# Altium PCB HighPowerMotorController.PcbDoc
Units mil, origin at the board's own origin, x right, y up, seen from the top; angles counter-clockwise.
Board outline 6000 x 6000 mil, 4 copper layers (Top Layer, Internal Plane 1, Internal Plane 2, Bottom Layer); 57 components, 49 nets, 172 pads, 28 vias.
Unrouted connection lines stored in the file: 1.
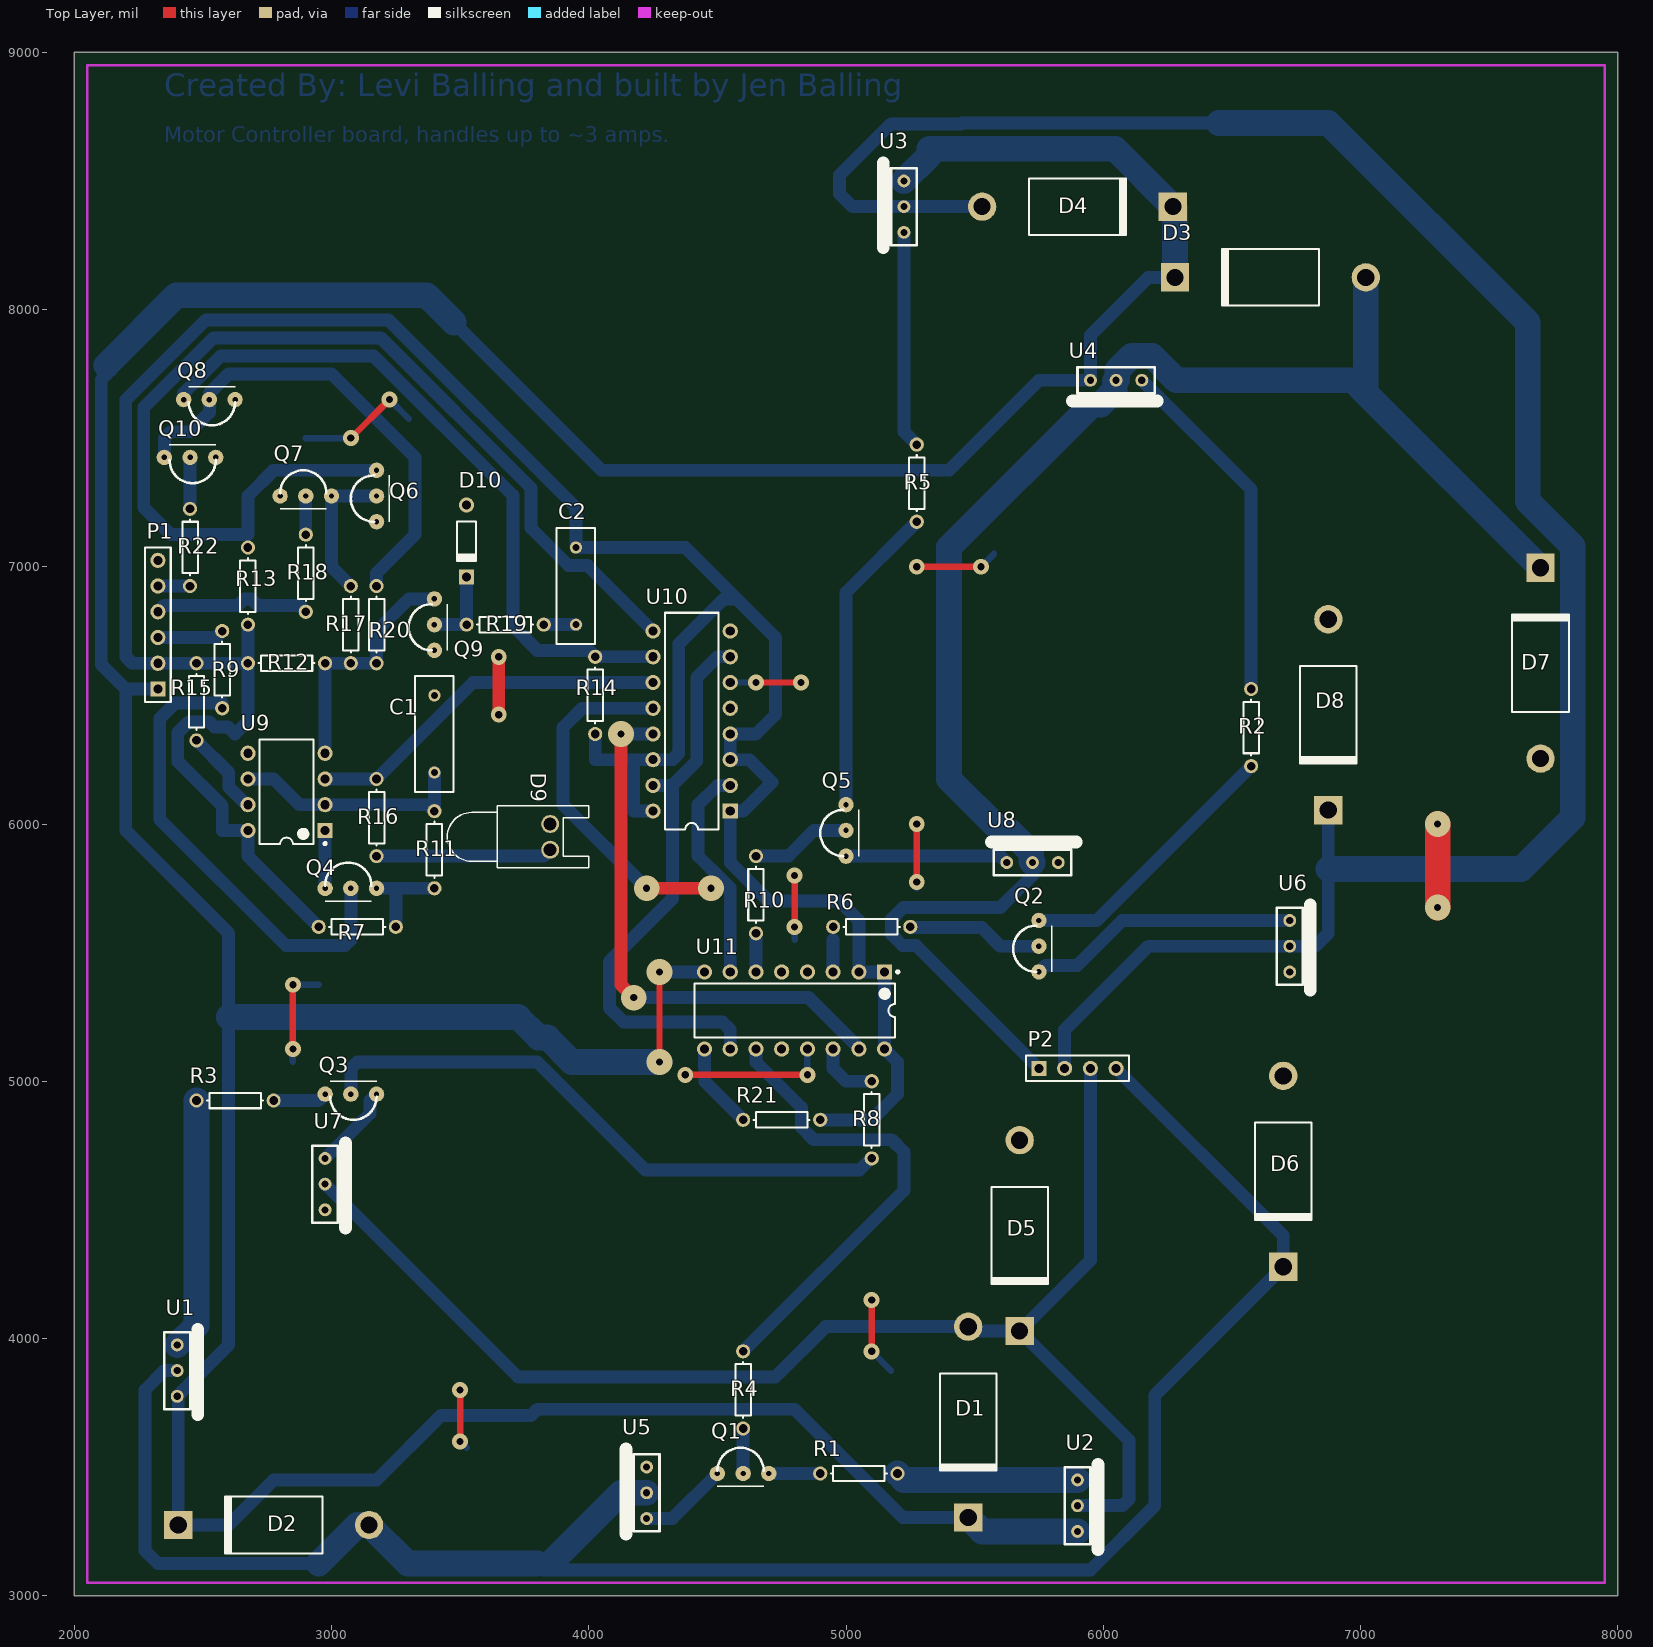
[diagram p0: Top Layer view]
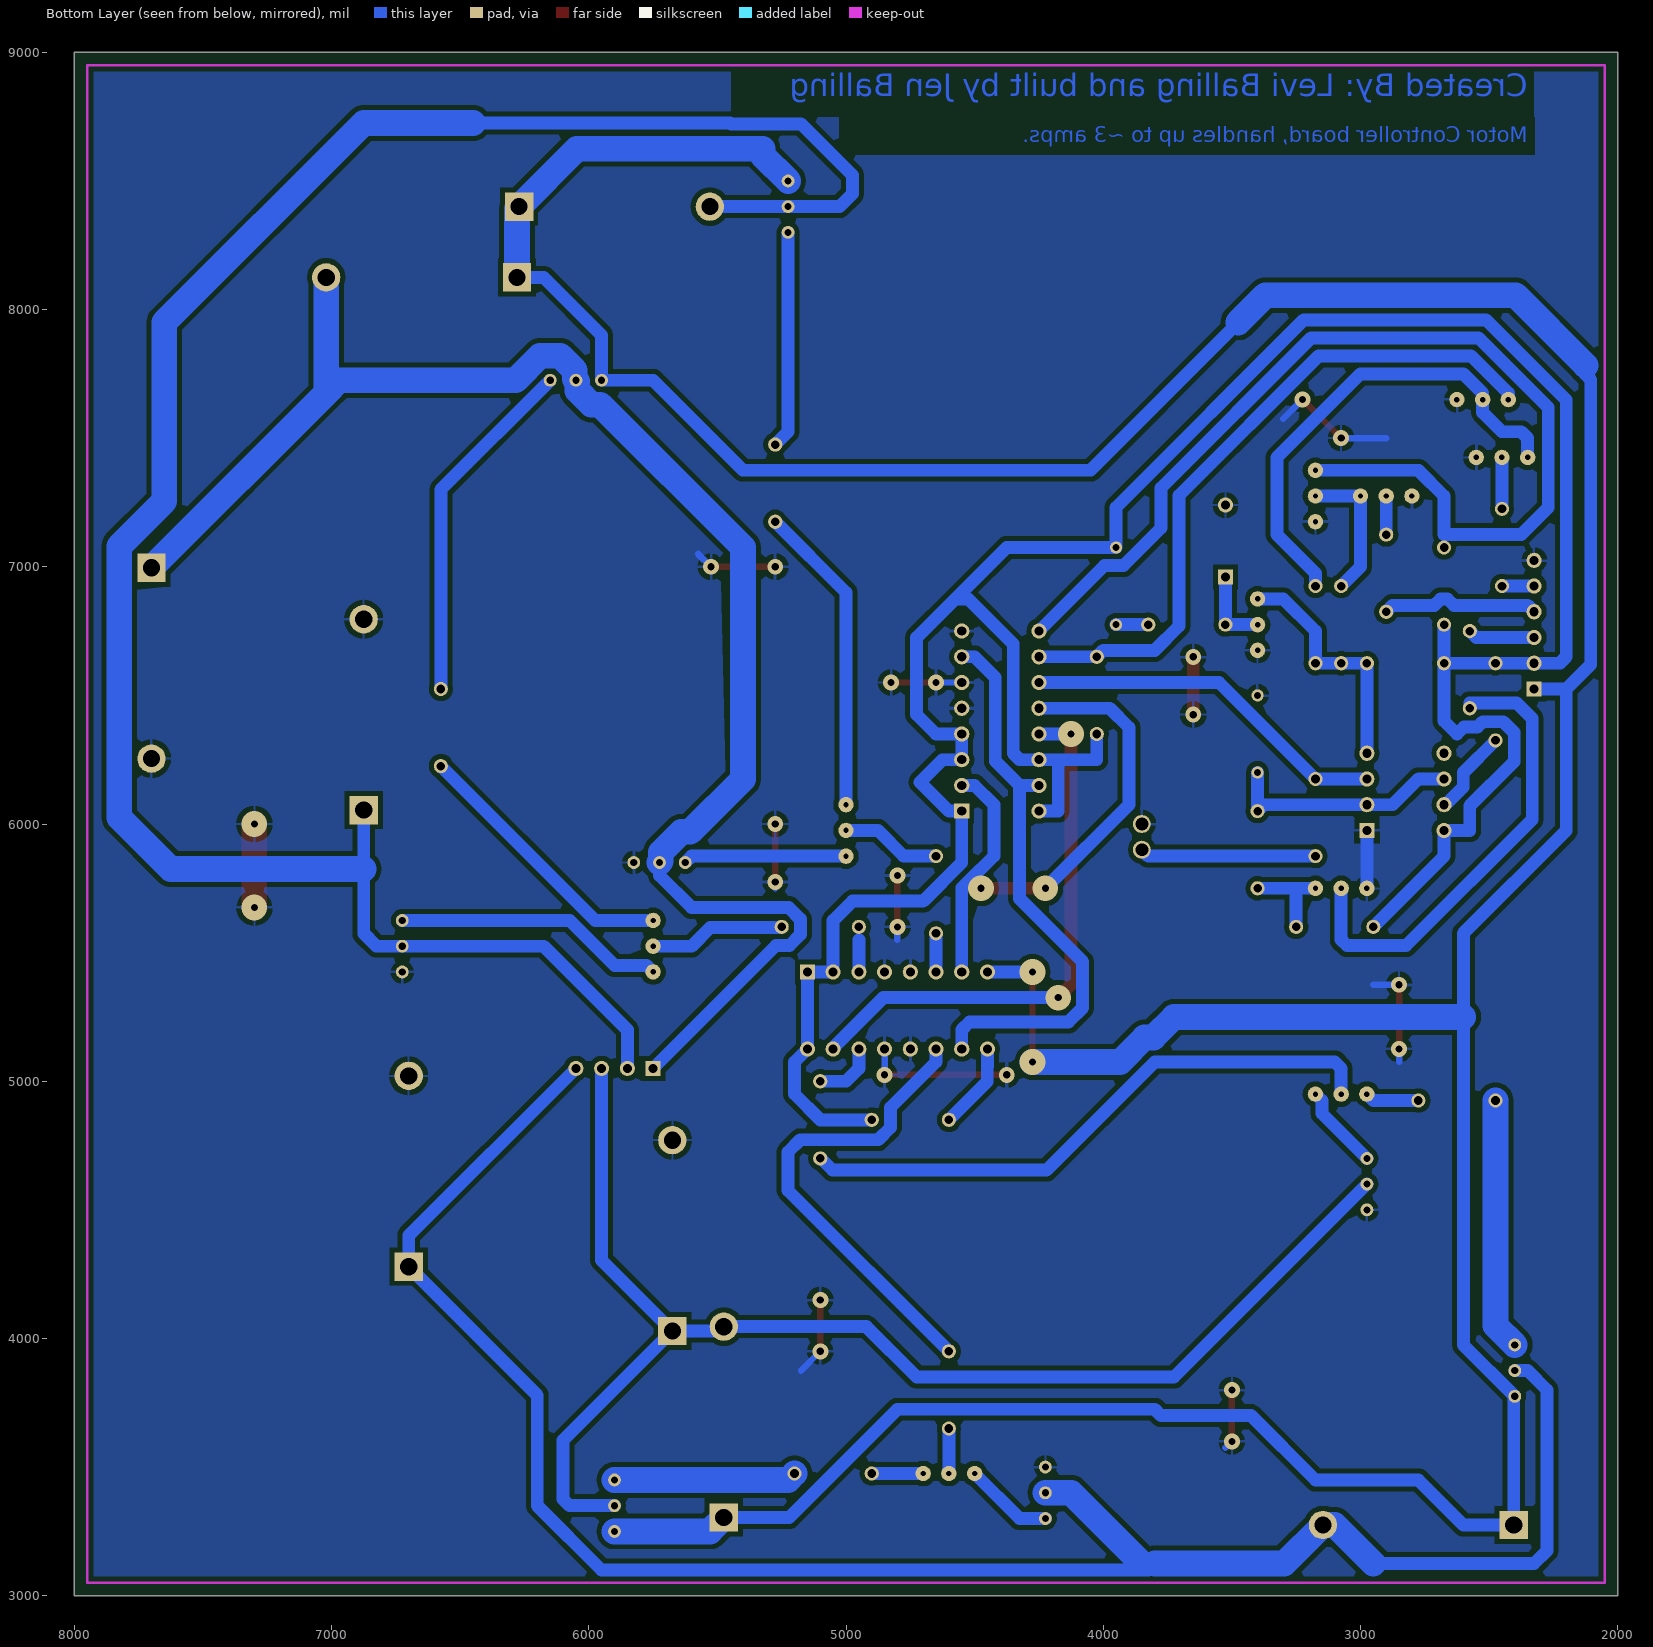
[diagram p1: Bottom Layer view, seen from below]
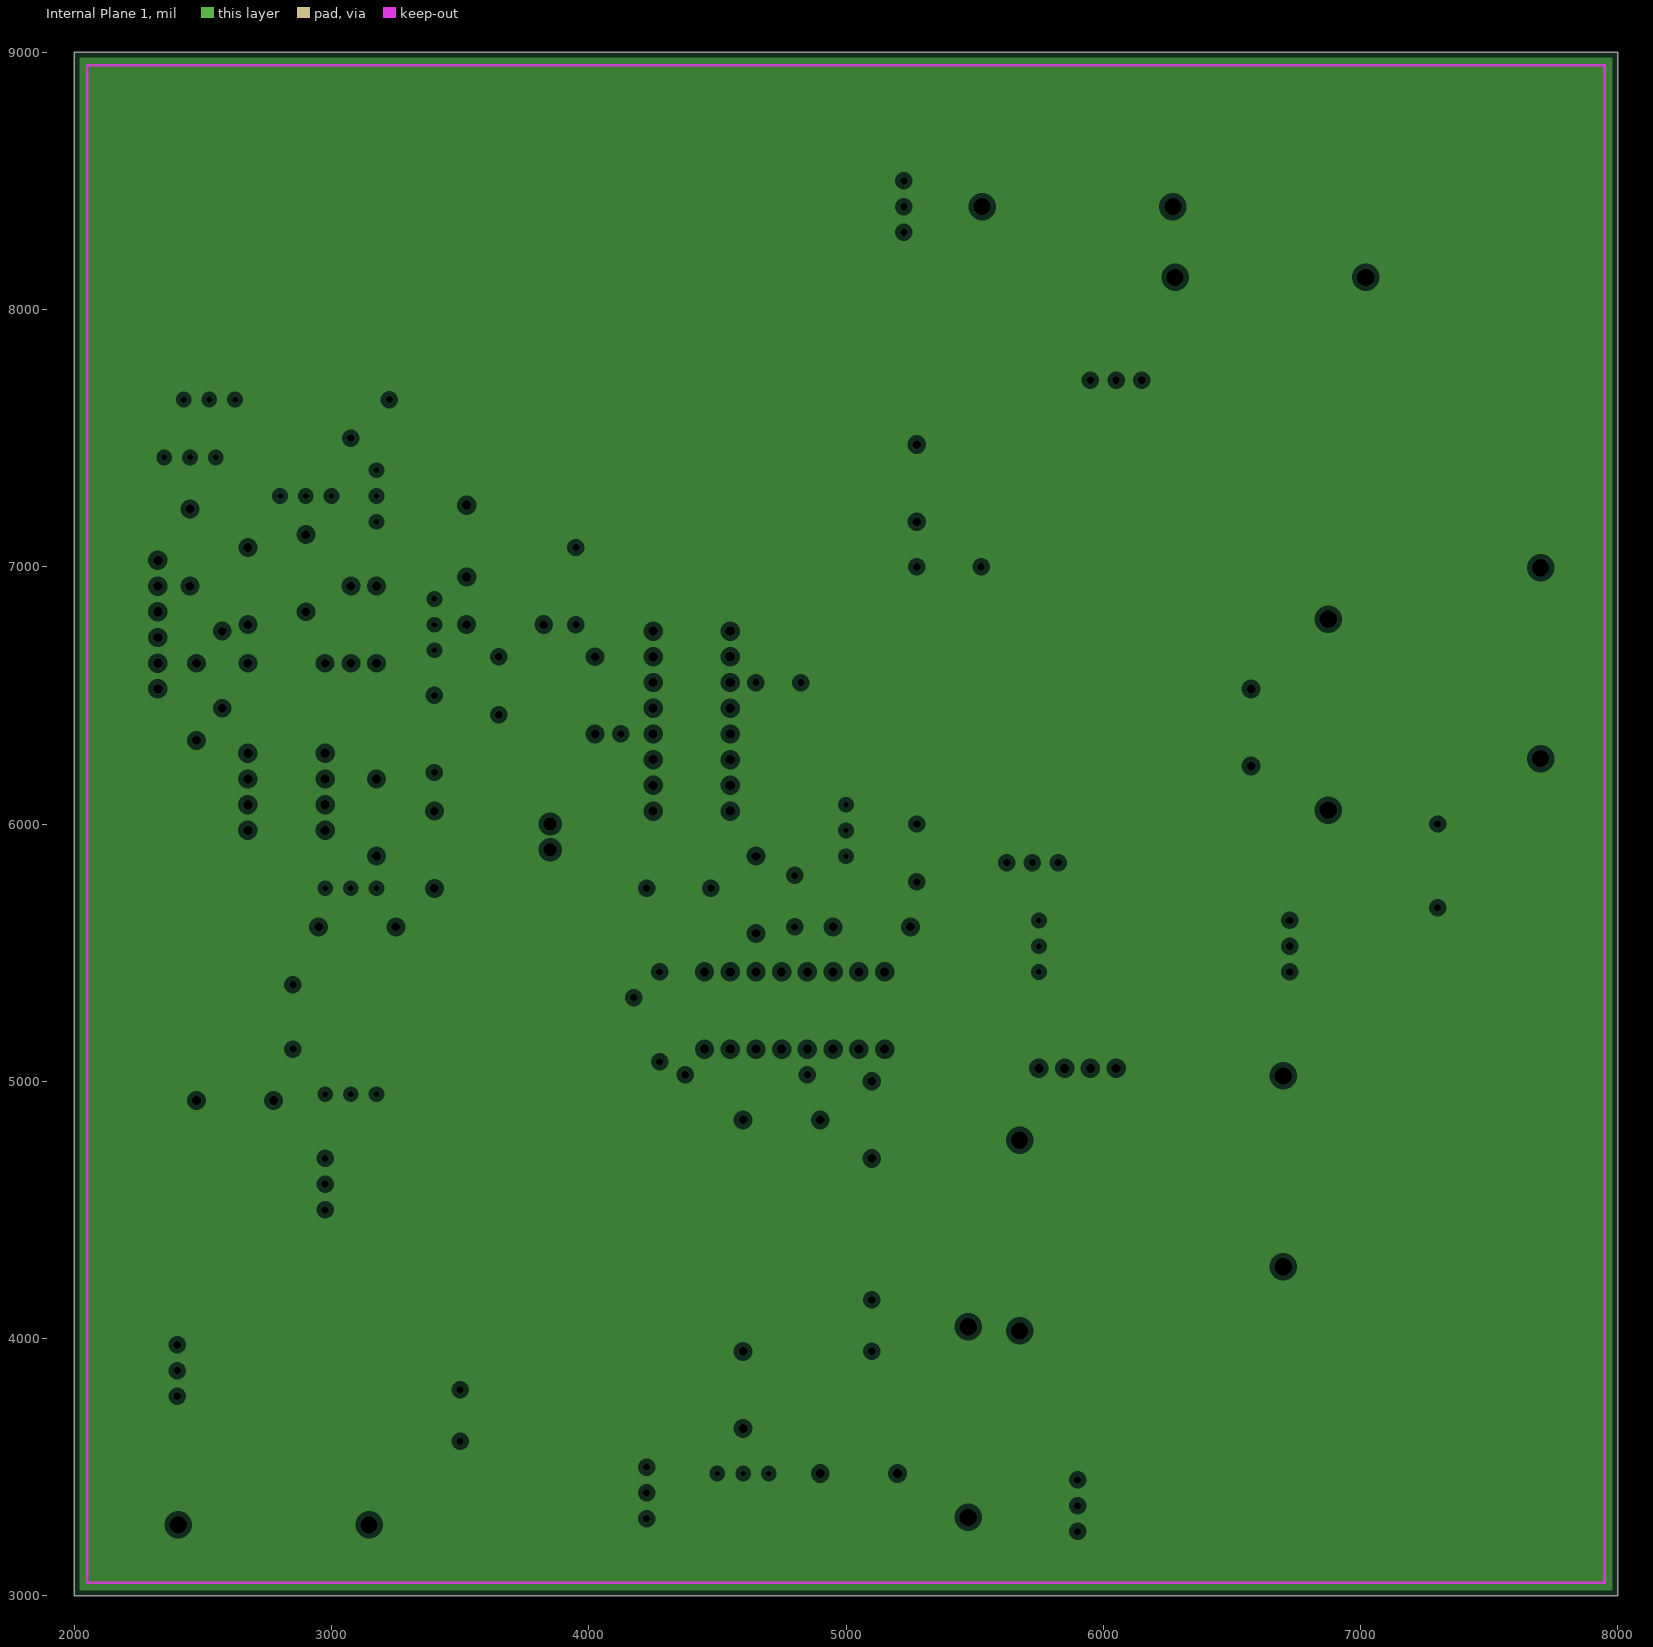
[diagram p2: Internal Plane 1, clearances drawn from the general rule]
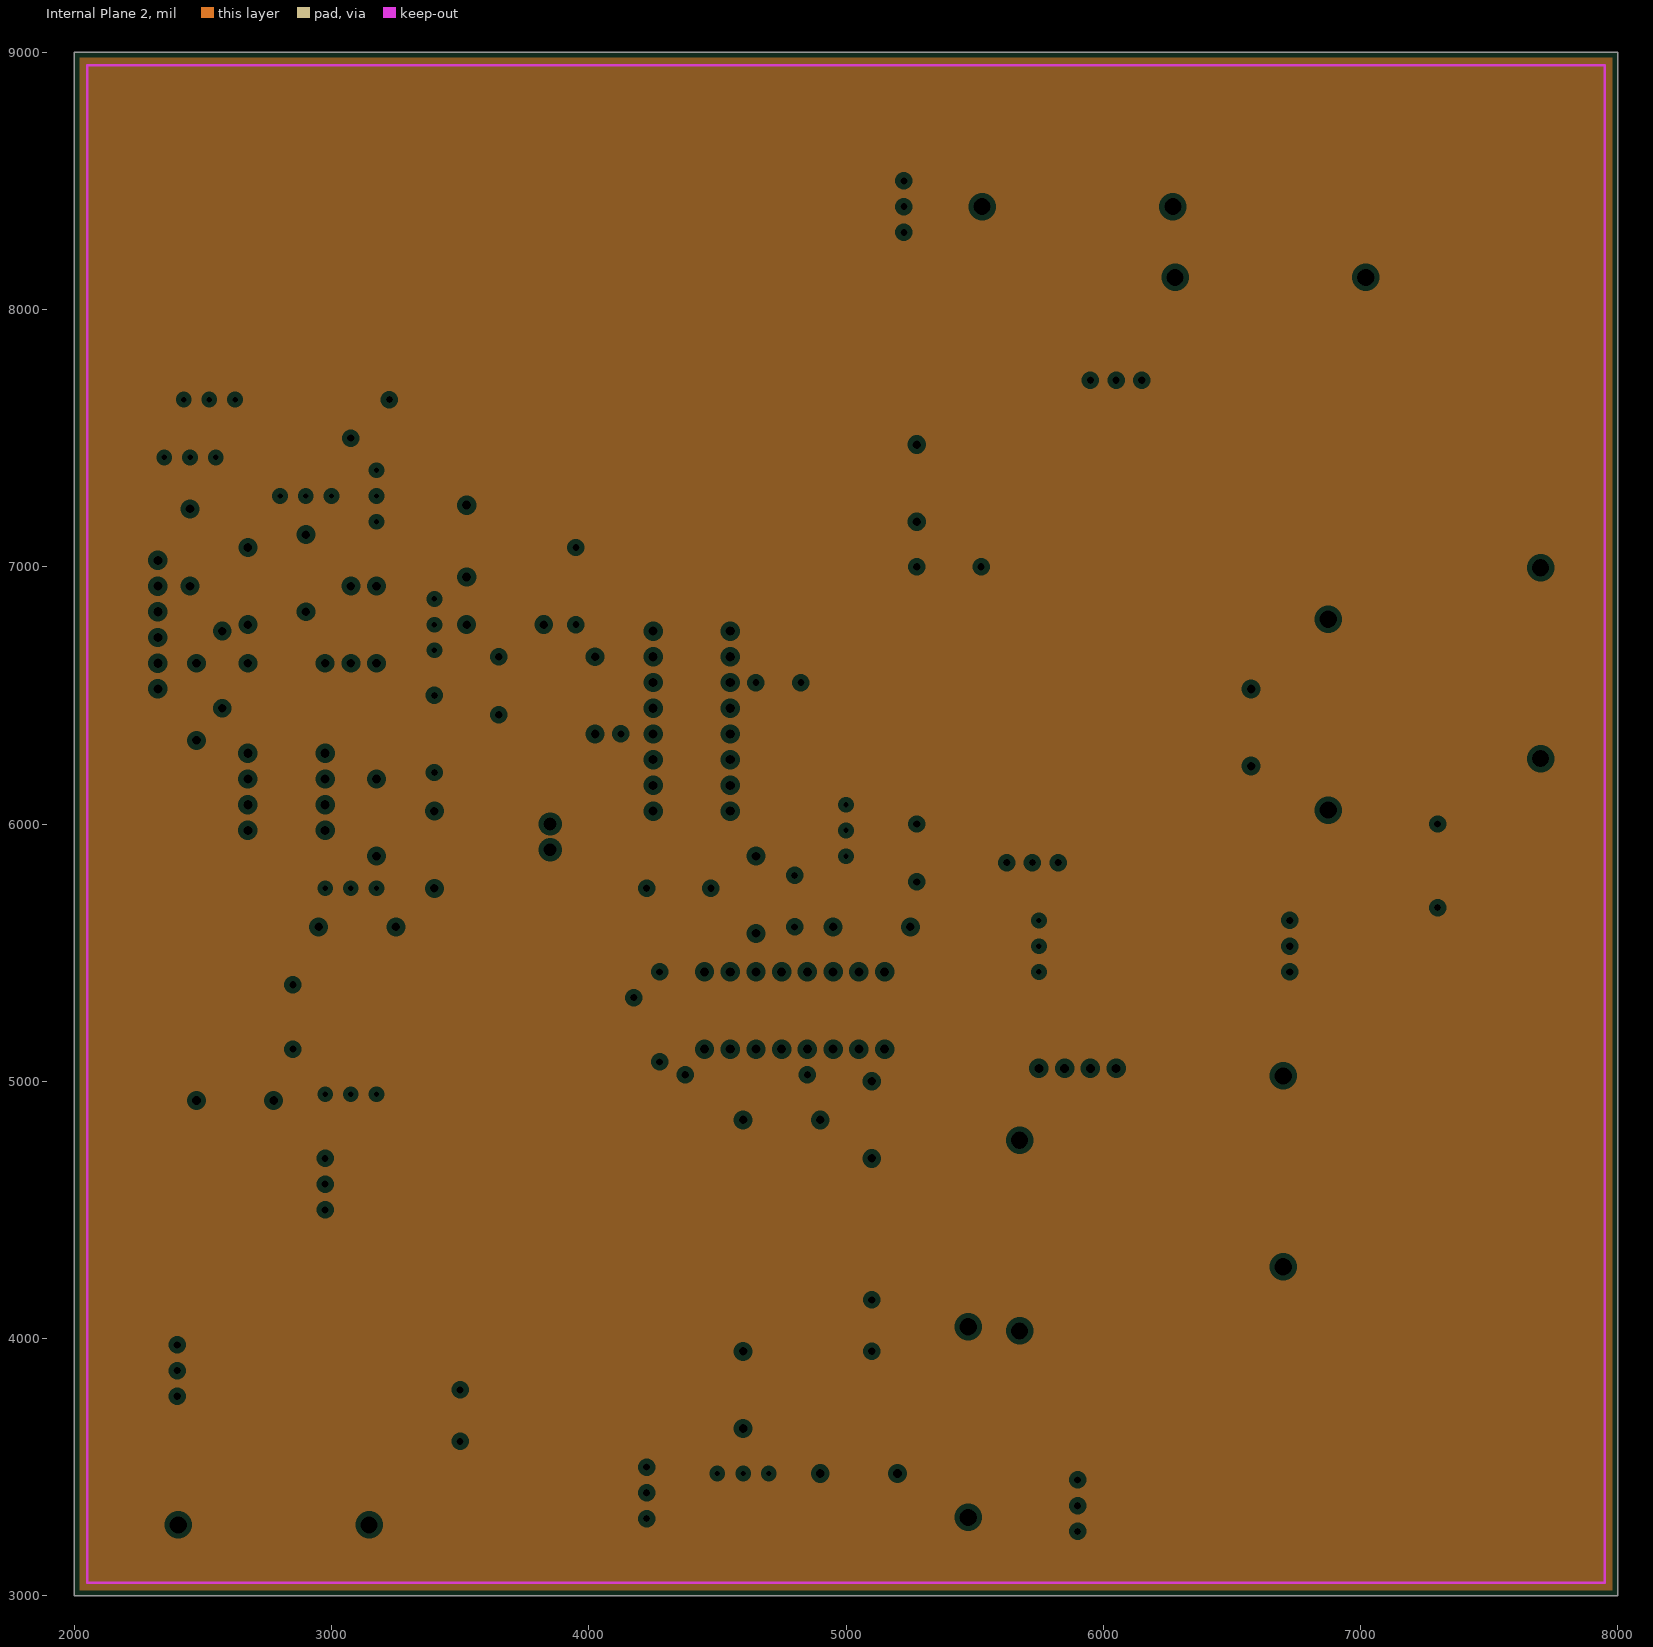
[diagram p3: Internal Plane 2, clearances drawn from the general rule]

## Layer stack, top to bottom
Top Layer: signal copper 1.4
Dielectric: dielectric 12.6, FR-4, Dk 4.8
Internal Plane 1: plane copper 1.4
Dielectric: dielectric 12.6, FR-4, Dk 4.8
Internal Plane 2: plane copper 1.4
Dielectric: dielectric 12.6, FR-4, Dk 4.8
Bottom Layer: signal copper 1.4

## Board outline
2000,3000 8000,3000 8000,9000 2000,9000

## Design rules (kind name [scope] priority, off if disabled: settings)
Clearance [All] p1: gap=20
PlaneClearance [All] p1: clearance=20
PlaneConnect [All] p1: planeconnectstyle=Relief reliefexpansion=20 reliefentries=4 reliefconductorwidth=10 reliefairgap=10
PolygonConnect [All] p1: connectstyle=Relief reliefconductorwidth=10 reliefentries=4 polygonreliefangle="90 Angle"
RoomDefinition MotorController [InComponentClass('MotorController')] p1: confinementstyle=ConfineIn formatcopy=TRUE lockcomponents=FALSE outline 7950,9025 2050,9025 2050,3050 7950,3050
RoutingVias [All] p1: holewidth=32 width=62 viastyle="Through Hole" minholewidth=28 minwidth=50 maxholewidth=28 maxwidth=100
SilkscreenOverComponentPads [All] p1: minsilkscreentomaskgap=10
SolderMaskExpansion [All] p1: expansion=4
Width [All] p1: maxlimit=100 minlimit=25 preferedwidth=25 minimp=50.000000 maximp=50.000000 favimp=50.000000
25 further rules are at their usual default settings.

## Components (designator, comment, footprint, x,y, rotation, side; value= is the part's Value field where it differs from the comment)
C1 "Cap" RAD-0.3 3400,6350 r90 top
C2 "Cap" RAD-0.3 3950,6925 r270 top
D1 "Diode 1N5408" DO-201AD 5475,3675 r270 top
D2 "Diode 1N5408" DO-201AD 2775,3275 r180 top
D3 "Diode 1N5408" DO-201AD 6650,8125 r180 top
D4 "Diode 1N5408" DO-201AD 5900,8400 r0 top
D5 "Diode 1N5408" DO-201AD 5675,4400 r270 top
D6 "Diode 1N5408" DO-201AD 6700,4650 r270 top
D7 "Diode 1N5408" DO-201AD 7700,6625 r90 top
D8 "Diode 1N5408" DO-201AD 6875,6425 r270 top
D9 "LED0" LED-0 3850,5950 r270 top
D10 "Diode 1N4148" DO-35 3525,7100 r270 top
P1 "Header 6" HDR1X6 2325,6525 r90 top
P2 "Header 4" HDR1X4 5750,5050 r0 top
Q1 "2N3904" 2N3904 4500,3475 r0 top
Q2 "2N3904" 2N3904 5750,5425 r90 top
Q3 "2N3904" 2N3904 3175,4950 r180 top
Q4 "2N3904" 2N3904 2975,5750 r0 top
Q5 "2N3904" 2N3904 5000,5875 r90 top
Q6 "2N3904" 2N3904 3175,7175 r90 top
Q7 "2N3904" 2N3904 2800,7275 r0 top
Q8 "2N3904" 2N3904 2625,7650 r180 top
Q9 "2N3904" 2N3904 3400,6675 r90 top
Q10 "2N3904" 2N3904 2550,7425 r180 top
R1 "Res1" AXIAL-0.3 5050,3475 r0 top
R2 "Res1" AXIAL-0.3 6575,6375 r90 top
R3 "Res1" AXIAL-0.3 2625,4925 r180 top
R4 "Res1" AXIAL-0.3 4600,3800 r270 top
R5 "Res1" AXIAL-0.3 5275,7325 r90 top
R6 "Res1" AXIAL-0.3 5100,5600 r0 top
R7 "Res1" AXIAL-0.3 3100,5600 r180 top
R8 "Res1" AXIAL-0.3 5100,4850 r270 top
R9 "Res1" AXIAL-0.3 2575,6600 r90 top
R10 "Res1" AXIAL-0.3 4650,5725 r90 top
R11 "Res1" AXIAL-0.3 3400,5900 r270 top
R12 "Res1" AXIAL-0.3 2825,6625 r0 top
R13 "Res1" AXIAL-0.3 2675,6925 r90 top
R14 "Res1" AXIAL-0.3 4025,6500 r90 top
R15 "Res1" AXIAL-0.3 2475,6475 r90 top
R16 "Res1" AXIAL-0.3 3175,6025 r270 top
R17 "Res1" AXIAL-0.3 3075,6775 r90 top
R18 "Res1" AXIAL-0.3 2900,6975 r270 top
R19 "Res1" AXIAL-0.3 3675,6775 r180 top
R20 "Res1" AXIAL-0.3 3175,6775 r90 top
R21 "Res1" AXIAL-0.3 4750,4850 r180 top
R22 "Res1" AXIAL-0.3 2450,7075 r270 top
U1 "TIP126" TO-220 2400,3975 r270 top
U2 "TIP126" TO-220 5900,3450 r270 top
U3 "TIP126" TO-220 5225,8300 r90 top
U4 "TIP126" TO-220 6150,7725 r180 top
U5 "TIP120" TO-220 4225,3300 r90 top
U6 "TIP120" TO-220 6725,5625 r270 top
U7 "TIP120" TO-220 2975,4700 r270 top
U8 "TIP120" TO-220 5625,5850 r0 top
U9 "LM555CN" N08E 2825,6125 r180 top
U10 "MC74HC194N" 648-06 4400,6400 r90 top
U11 "SN754410NE" NE016 4800,5275 r270 top

## Footprints (in the part's own frame and the unit in brackets; to place one, negate y for a bottom-side part, rotate by r counter-clockwise, add the part's x,y. Pads: shape width x height; smd on the part's side, far side on the other; paste and mask are expansions set on the pad)
2N3904 [mil] "simple transistor, but bigger holes and pads"
  round 60 hole 21: 1(0,0) 2(100,0) 3(200,0)
  silkscreen extent 0,-50 180,100
648-06 [mm] "DIP; 16 Leads; Row Spacing 7.62 mm; Pitch 2.54 mm"
  rect 1.5x1.5 hole 0.9: 1(-8.89,-3.81)
  round 1.5 hole 0.9: 2(-6.35,-3.81) 3(-3.81,-3.81) 4(-1.27,-3.81) 5(1.27,-3.81) 6(3.81,-3.81) 7(6.35,-3.81) 8(8.89,-3.81) 9(8.89,3.81) 10(6.35,3.81) 11(3.81,3.81) 12(1.27,3.81) 13(-1.27,3.81) 14(-3.81,3.81) 15(-6.35,3.81) 16(-8.89,3.81)
  silkscreen extent -10.7,-2.65 10.7,2.65
AXIAL-0.3 [mm] "Axial Device, Thru-Hole; 2 Leads; 0.3 in Pin Spacing"
  round 1.4 hole 0.85: 1(-3.81,0) 2(3.81,0)
  silkscreen extent -2.77,-0.76 2.77,0.76
DO-35 [mm] "Diode, Axial; Body 3.8 x 1.9 mm (LxDia. max), Lead Dia. 0.53 mm (max)"
  round 1.5 hole 0.9: 1(-3.55,0)
  rect 1.5x1.5 hole 0.9: 2(3.55,0)
  silkscreen extent -1.95,-0.95 2.05,0.95
DO-201AD [mm] "Diode, Axial; Body 9.5 x 5.6 mm (LxDia. max), Lead Dia. 1.32 mm (max)"
  round 2.8 hole 1.7: 1(-9.42,0)
  rect 2.8x2.8 hole 1.7: 2(9.42,0)
  silkscreen extent -4.8,-2.8 4.9,2.8
HDR1X4 [mm] "Connector; Header; 4 Position"
  rect 1.5x1.5 hole 0.9: 1(0,0)
  round 1.5 hole 0.9: 2(2.54,0) 3(5.08,0) 4(7.62,0)
  silkscreen extent -1.27,-1.27 8.89,1.27
HDR1X6 [mm] "Connector; Header; 6 Position"
  rect 1.5x1.5 hole 0.9: 1(0,0)
  round 1.5 hole 0.9: 2(2.54,0) 3(5.08,0) 4(7.62,0) 5(10.16,0) 6(12.7,0)
  silkscreen extent -1.27,-1.27 13.97,1.27
LED-0 [mil] "LED; 2 Leads"
  round 70 hole 50: 1(50,0) 2(-50,0)
  silkscreen extent -120,-400 120,150
N08E [mm] "DIP, 8-Leads, Row Spacing 7.62mm, Pitch 2.54mm, Body 9.91x6.35mm"
  rect 1.5x1.5 hole 0.9: 1(-3.81,3.81)
  round 1.5 hole 0.9: 2(-3.81,1.27) 3(-3.81,-1.27) 4(-3.81,-3.81) 5(3.81,-3.81) 6(3.81,-1.27) 7(3.81,1.27) 8(3.81,3.81)
  silkscreen extent -3.94,-5.15 2.65,5.23, body extent -3.6,-5.15 3.6,5.15, height 5.34
NE016 [mm] "DIP, 16-Leads, Row Spacing 7.62mm, Pitch 2.54mm, Body 19.4x6.35mm"
  rect 1.5x1.5 hole 0.9: 1(-3.81,8.89)
  round 1.5 hole 0.9: 2(-3.81,6.35) 3(-3.81,3.81) 4(-3.81,1.27) 5(-3.81,-1.27) 6(-3.81,-3.81) 7(-3.81,-6.35) 8(-3.81,-8.89) 9(3.81,-8.89) 10(3.81,-6.35) 11(3.81,-3.81) 12(3.81,-1.27) 13(3.81,1.27) 14(3.81,3.81) 15(3.81,6.35) 16(3.81,8.89)
  silkscreen extent -3.93,-9.9 2.65,10.32, body extent -3.3,-9.9 3.3,9.9, height 5.08
RAD-0.3 [mm] "Radial Cap, Thru-Hole; 2 Leads; 0.3 in Pin Spacing"
  round 1.2 hole 0.7: 1(-3.81,0) 2(3.81,0)
  silkscreen extent -5.71,-1.91 5.71,1.91
TO-220 [mil] "Foot Print for a TO-220"
  round 50 hole 28: 1(0,0) 2(100,0) 3(200,0)
  silkscreen extent -60,-50 270,80

## Part data
C1 C2: "Capacitor"
D1 D2 D3 D4 D5 D6 D7 D8: "3 Amp Medium Power Silicon Rectifier Diode"
D9: "Typical INFRARED GaAs LED"
D10: "High Conductance Fast Diode"
P1: "Header, 6-Pin"
P2: "Header, 4-Pin"
Q1 Q2 Q3 Q4 Q5 Q6 Q7 Q8 Q9 Q10: "NPN General Purpose Amplifier"
R1 R2 R3 R4 R5 R6 R7 R8 R9 R10 R11 R12 R13 R14 R15 R16 R17 R18 R19 R20 R21 R22: "Resistor"
U1 U2 U3 U4: "TIP126 -PNP"
U5 U6 U7 U8: "NPN 60V -5A TO-220"
U9: "Timer"
U10: "4-Bit Bidirectional Universal Shift Register"
U11: "Quadruple Half-H Driver"

## Via types
v1: diameter 62, hole 28, Top Layer to Bottom Layer, 20 vias
v2: diameter 100, hole 28, Top Layer to Bottom Layer, 8 vias

## Nets (pads, with @x,y where several pads share a name; then routed paths per layer and width w, separated by ;. In a path a pad name is that pad's centre, name@x,y a point inside that pad or via, vN(x,y) a via of type N, cw(c..) or ccw(c..) an arc to the next point about the centre after c; other vN are vias at no path point)
COILA1: D3.1 D7.2 P2.1 U4.2 U8.2 | length 6285.9
  Bottom Layer w50: 5725,5800 5600,5675 5222.39,5675 5177.44,5630.05 5177.44,5569.95 5219.95,5527.44 5272.56,5527.44 P2.1
  Bottom Layer w100: U8.2 5720,5855 5720,5889.35 5639.35,5970 5605,5970 5400,6175 5400,7075 5955,7630 5989.35,7630 6045,7685.65 6045,7720 U4.2 6055,7730 6055,7764.35 6110.65,7820 6189.35,7820 6284.35,7725 6970.87,7725 7020.87,7675 ; D3.1 7020.87,7675 ; D7.2 7020.87,7675
COILA1_LOW: R6.1 U11.3 | length 125
  Bottom Layer w50: U11.3 4950,5550
COILA2: D4.1 D8.2 P2.2 U3.2 U6.2 | length 8567.1
  Bottom Layer w50: D4.1 U3.2 5025,8400 4975,8450 4975,8522.22 5174.37,8721.6 5447.01,8721.6 5450.42,8725 6450,8725 ; P2.2 5850,5200 6175,5525 U6.2 6825,5525 6875,5575 6875,5825 D8.2
  Bottom Layer w100: 6450,8725 6875,8725 7650,7950 7650,7255.1 7825.12,7079.98 7825.12,6911.63 7825,6911.52 7825,6306.08 7825.12,6305.96 7825.12,6202.19 7825,6202.07 7825,6025 7625,5825 6875,5825
COILA2_LOW: R10.1 U11.6 | length 150
  Bottom Layer w50: U11.6 R10.1
COILB1: D1.1 D5.2 P2.3 U2.2 U7.2 | length 5274
  Bottom Layer w50: U7.2 3725,3850 4725,3850 4920.87,4045.87 D1.1 5491.73,4029.13 D5.2 ; U2.2 6075,3350 6100,3375 6100,3604.13 D5.2 ; P2.3 5950,4304.13 D5.2
COILB1_LOW: R4.1 U11.11 | length 1849.3
  Bottom Layer w50: R4.1 5225,4575 5225,4725 5177.44,4772.56 4874.83,4772.56 4827.44,4819.95 4827.44,4897.56 4650,5075 U11.11
COILB2: D2.1 D6.2 P2.4 U1.2 U5.2 | length 7630.2
  Bottom Layer w50: U1.2 2350,3875 2275,3800 2275,3175 2325,3125 2950,3125 ; 3800,3125 3825,3100 5950,3100 6200,3350 6200,3779.13 D6.2 6700,4400 P2.4
  Bottom Layer w100: 2950,3125 3100,3275 D2.1 3295.87,3125 3800,3125 ; 3850,3125 4125,3400 U5.2
COILB2_LOW: R8.1 U11.14 | length 245.7
  Bottom Layer w50: U11.14 4950,5050 5000,5000 R8.1
DIRECTION1: P1.4 R18.2 | length 616.4
  Bottom Layer w50: P1.4 2350,6850 2636.65,6850 2661.65,6875 2688.35,6875 2713.35,6850 2875,6850 R18.2
DIRECTION2: P1.5 R22.2 | length 125
  Bottom Layer w50: P1.5 R22.2
GND: C1.2 D5.1 D6.1 D7.1 D8.1 D9.2 D10.1 P1.6 Q4.1 Q6.1 Q7.1 Q8.1 Q9.1 Q10.1 U5.3 U6.3 U7.3 U8.3 U9.1 U10.5 U10.6 U10.8 U11.4 U11.5 U11.12 U11.13 | length 3880.3
  Top Layer w25: v1(2850,5125) v1(2850,5375) ; v1(3075,7500) v1(3225,7650) ; v1(3500,3600) v1(3500,3800) ; v1(4375,5025) v1(4850,5025) ; v1(4649.61,6550) v1(4825,6550) ; v1(4800,5600) v1(4800,5800) ; v1(5100,3950) v1(5100,4150) ; v1(5275,5775) v1(5275,6000) ; v1(5275,7000) v1(5525,7000)
  Top Layer w50: v1(3650,6425) v1(3650,6650)
  Top Layer w100: v2(7300,5675) v2(7300,6000)
  Bottom Layer w25: 2850,5075 v1(2850,5125) ; v1(2850,5375) 2950,5375 ; 2900,7500 v1(3075,7500) ; v1(3225,7650) 3300,7575 ; v1(3500,3600) 3525,3575 ; U10.6 v1(4649.61,6550) ; 4800,5550 v1(4800,5600) ; v1(4850,5025) U11.13 ; v1(5100,3950) 5175,3875 ; v1@5275,5750 v1(5275,5775) ; v1(5525,7000) 5575,7050
  Bottom Layer w50: Q4.1 U9.1
NetC1_1: C1.1 R11.1 U9.2 U9.6 | length 926.8
  Bottom Layer w50: U9.6 2775,6175 2875,6075 U9.2 3375,6075 R11.1 C1.1
NetC2_2: C2.2 R19.1 | length 125
  Bottom Layer w50: R19.1 C2.2
NetD9_1: D9.1 R16.2 | length 685.4
  Bottom Layer w50: R16.2 3825,5875 D9.1
NetD10_2: D10.2 Q9.2 R19.2 | length 310.2
  Bottom Layer w50: Q9.2 R19.2 D10.2
NetQ1_1: Q1.1 U5.1 | length 347.5
  Bottom Layer w50: U5.1 4325,3300 Q1.1
NetQ1_2: Q1.2 R4.2 | length 175
  Bottom Layer w50: Q1.2 R4.2
NetQ1_3: Q1.3 R1.1 | length 200
  Bottom Layer w50: Q1.3 R1.1
NetQ2_1: Q2.1 U6.1 | length 1057.8
  Bottom Layer w50: Q2.1 5775,5450 5898.99,5450 6073.99,5625 U6.1
NetQ2_2: Q2.2 R6.2 | length 531.1
  Bottom Layer w50: R6.2 5252.56,5597.44 5527.56,5597.44 5600,5525 Q2.2
NetQ2_3: Q2.3 R2.1 | length 1073.5
  Bottom Layer w50: Q2.3 5975,5625 R2.1
NetQ3_1: Q3.1 U7.1 | length 332.8
  Bottom Layer w50: U7.1 3150,4875 3150,4925 Q3.1
NetQ3_2: Q3.2 R8.2 | length 2328
  Bottom Layer w50: Q3.2 3075,5050 3100,5075 3800,5075 4220,4655 5052.44,4655 5097.44,4700 R8.2
NetQ3_3: Q3.3 R3.1 | length 210.4
  Bottom Layer w50: R3.1 2950,4925 Q3.3
NetQ4_2: Q4.2 R9.1 | length 1834.6
  Bottom Layer w50: R9.1 2575,6470 2392.69,6470 2332.44,6409.75 2332.44,6017.56 2822.56,5527.44 3052.44,5527.44 3075,5550 Q4.2
NetQ4_3: Q4.3 R7.1 R11.2 | length 375
  Bottom Layer w50: Q4.3 3250,5750 ; R7.1 3250,5750 ; R11.2 3250,5750
NetQ5_1: Q5.1 U8.1 | length 635.4
  Bottom Layer w50: Q5.1 5600,5875 U8.1
NetQ5_2: Q5.2 R10.2 | length 391.4
  Bottom Layer w50: R10.2 4651,5876 4776,5876 4875,5975 Q5.2
NetQ5_3: Q5.3 R5.1 | length 1213.9
  Bottom Layer w50: Q5.3 5000,6900 R5.1
NetQ6_2: Q6.2 Q7.3 R17.2 | length 556.1
  Bottom Layer w50: R17.2 3000,7000 Q7.3 Q6.2
NetQ6_3: Q6.3 R13.2 U10.9 | length 4184.4
  Bottom Layer w50: Q6.3 2775,7375 2675,7275 2675,7125 2375,7125 2270,7230 2270,7618.99 2541.01,7890 3191.48,7890 3775,7306.48 3775,7151.01 3921.01,7005 3995,7005 U10.9
NetQ7_2: Q7.2 R18.1 | length 150
  Bottom Layer w50: R18.1 Q7.2
NetQ8_2: Q8.2 Q10.3 R20.2 | length 1894.2
  Bottom Layer w50: Q10.3 2350,7500 2375,7525 2450,7525 2525,7600 Q8.2 2525,7675 2600,7750 3000,7750 3325,7425 3325,7125 3175,6975 R20.2
NetQ8_3: Q8.3 R14.2 U10.10 | length 2692
  Bottom Layer w50: Q8.3 2425,7675 2570,7820 3162.48,7820 3705,7277.48 3705,6770 3800,6675 4000,6675 R14.2 U10.10
NetQ9_3: Q9.3 R12.2 R17.1 R20.1 U9.4 | length 951.8
  Bottom Layer w50: U9.4 R12.2 R17.1 R20.1 3175,6750 3300,6875 Q9.3
NetQ10_2: Q10.2 R22.1 | length 200
  Bottom Layer w50: R22.1 Q10.2
NetR1_2: R1.2 U2.1 | length 710.4
  Bottom Layer w100: R1.2 5225,3450 U2.1
NetR2_2: R2.2 U4.1 | length 1376
  Bottom Layer w50: U4.1 6575,7300 R2.2
NetR3_2: R3.2 U1.1 | length 981.1
  Bottom Layer w100: U1.1 2475,4050 R3.2
NetR5_2: R5.2 U3.1 | length 845.7
  Bottom Layer w50: U3.1 5225,7525 R5.2
NetR15_1: R15.1 U9.7 | length 336
  Bottom Layer w50: R15.1 2600.47,6199.53 2600.47,6144.13 2669.6,6075 U9.7
NetR16_1: R16.1 U9.3 U10.11 | length 1430.3
  Bottom Layer w50: U9.3 R16.1 3550,6550 U10.11
NetR21_2: R21.2 U11.9 | length 337.1
  Bottom Layer w50: U11.9 4450,5057.48 4451,5056.48 4451,4999 R21.2
NetU10_2: U10.2 U10.12 U11.7 | length 2309.3
  Top Layer w50: v2(4225,5750) v2(4475,5750)
  Bottom Layer w50: v2(4225,5750) 3900,6075 3900,6375 3975,6450 U10.12 ; v2(4475,5750) 4501.01,5776.01 4525,5776.01 ; U11.7 4550,5751.01 4525,5776.01 ; U10.2 4500,6150 4425,6075 4425,5876.01 4525,5776.01
NetU10_7: U10.7 U10.15 U11.10 | length 2243.8
  Bottom Layer w50: U10.15 4325,6150 ; U11.10 4550,5200 4520,5230 4135.65,5230 4080,5285.65 4080,5464.35 4325,5709.35 4325,6150 ; U10.7 4500,6650 4420,6570 4420,6245 4325,6150
NetU10_13: U10.13 U11.15 | length 2131.7
  Top Layer w50: v2(4125,6350) 4125,5375 v2(4175,5325)
  Bottom Layer w50: v2(4125,6350) U10.13 ; v2(4175,5325) 4855.4,5325 5050,5130.4 U11.15
STEP_SIGNAL: P1.3 R9.2 | length 260.4
  Bottom Layer w50: P1.3 2550,6725 R9.2
VCC: C2.1 P1.2 R7.2 R12.1 R13.1 R14.1 R15.2 R21.1 U9.8 U10.1 U10.3 U10.4 U10.14 U10.16 U11.1 U11.2 U11.16 | length 10863.8
  Bottom Layer w50: R13.1 R12.1 ; R7.2 2675,5875 U9.8 2575,5975 2575,6070.61 2402.44,6243.17 2402.44,6355.05 2444.95,6397.56 2524.83,6397.56 2544.95,6377.44 2597.56,6377.44 2625,6350 2675,6400 R12.1 ; R14.1 4025,6250 4175,6250 ; U10.16 4175,6050 4175,6250 ; R21.1 5100,4850 5200,4950 5200,5075 U11.16 U11.1 U11.2 5050,5625 4975,5700 4700,5700 4550,5850 U10.1 4600,6050 4712.5,6162.5 4625,6250 U10.3 U10.4 4650,6350 4725.61,6425.61 4725.61,6724.39 4575,6875 ; R12.1 R15.2 P1.2 2225,6625 2200,6650 2200,7647.99 2512.01,7960 3220.47,7960 3950,7230.47 C2.1 4375,7075 4575,6875 ; 4175,6250 U10.14 4325,6250 4350,6275 4350,6700 4525,6875 4575,6875
VCC24: D1.2 D2.2 D3.2 D4.2 P1.1 U1.3 U2.3 U3.3 U4.3 U11.8 | length 17528.1
  Top Layer w25: v2(4275,5075) v2(4275,5425)
  Bottom Layer w50: 2125,7782.3 2125,7746.95 2105,7726.95 2105,6620 2200,6525 ; P1.1 2200,6525 ; 3475,7950 4050,7375 5400,7375 5750,7725 U4.3 5950,7900 6175,8125 D3.2 ; v2(4275,5425) U11.8 ; D1.2 5220.87,3304.13 4800,3725 3800,3725 3775,3700 3425,3700 3175,3450 2775,3450 2600,3275 D2.2 2404.13,3770.87 U1.3 2600,3975 2600,5250 2600,5575 2200,5975 2200,6525
  Bottom Layer w100: 2125,7782.3 2125,7783.35 2396.65,8055 3370,8055 3475,7950 ; 2600,5250 3725,5250 3805,5170 3839.35,5170 3934.35,5075 v2(4275,5075) ; U3.3 5325,8600 5325,8625 6045.87,8625 D4.2 6279.13,8391.73 D3.2 ; D1.2 5529.13,3250 U2.3
pads on no net: U9.5

## Polygon pours and split planes (outlines as drawn)
GND on Bottom Layer "Top Layer-No Net" (solid, pour order 5): 7950,3050 7950,8950 2050,8950 2050,3050
no net on Internal Plane 1 (split plane): 7979.9,3020.1 2020.1,3020.1 2020.1,8979.9 7979.9,8979.9
no net on Internal Plane 2 (split plane): 7979.9,3020.1 2020.1,3020.1 2020.1,8979.9 7979.9,8979.9

## Keep-outs
Keep-Out Layer:
  lines w10: 2050,3050 2050,8950 7950,8950 7950,3050 2050,3050

## Other copper
Bottom Layer:
  text "Created By: Levi Balling and built by Jen Balling" at 2350,8800 h150
  text "Motor Controller board, handles up to ~3 amps." at 2350,8650 h60

## Silkscreen, mask and mechanical layers (free items; w line width, h text height)
Drill Drawing:
  text ".LEGEND" at 8200,3200 h60
  text "Drill Drawing." at 8200,3100 h60

## Dimensions
2050,3050 to 2050,8950 on Mechanical 1
2050,3050 to 7950,3050 on Mechanical 1